# Allegro board bluttooth.brd
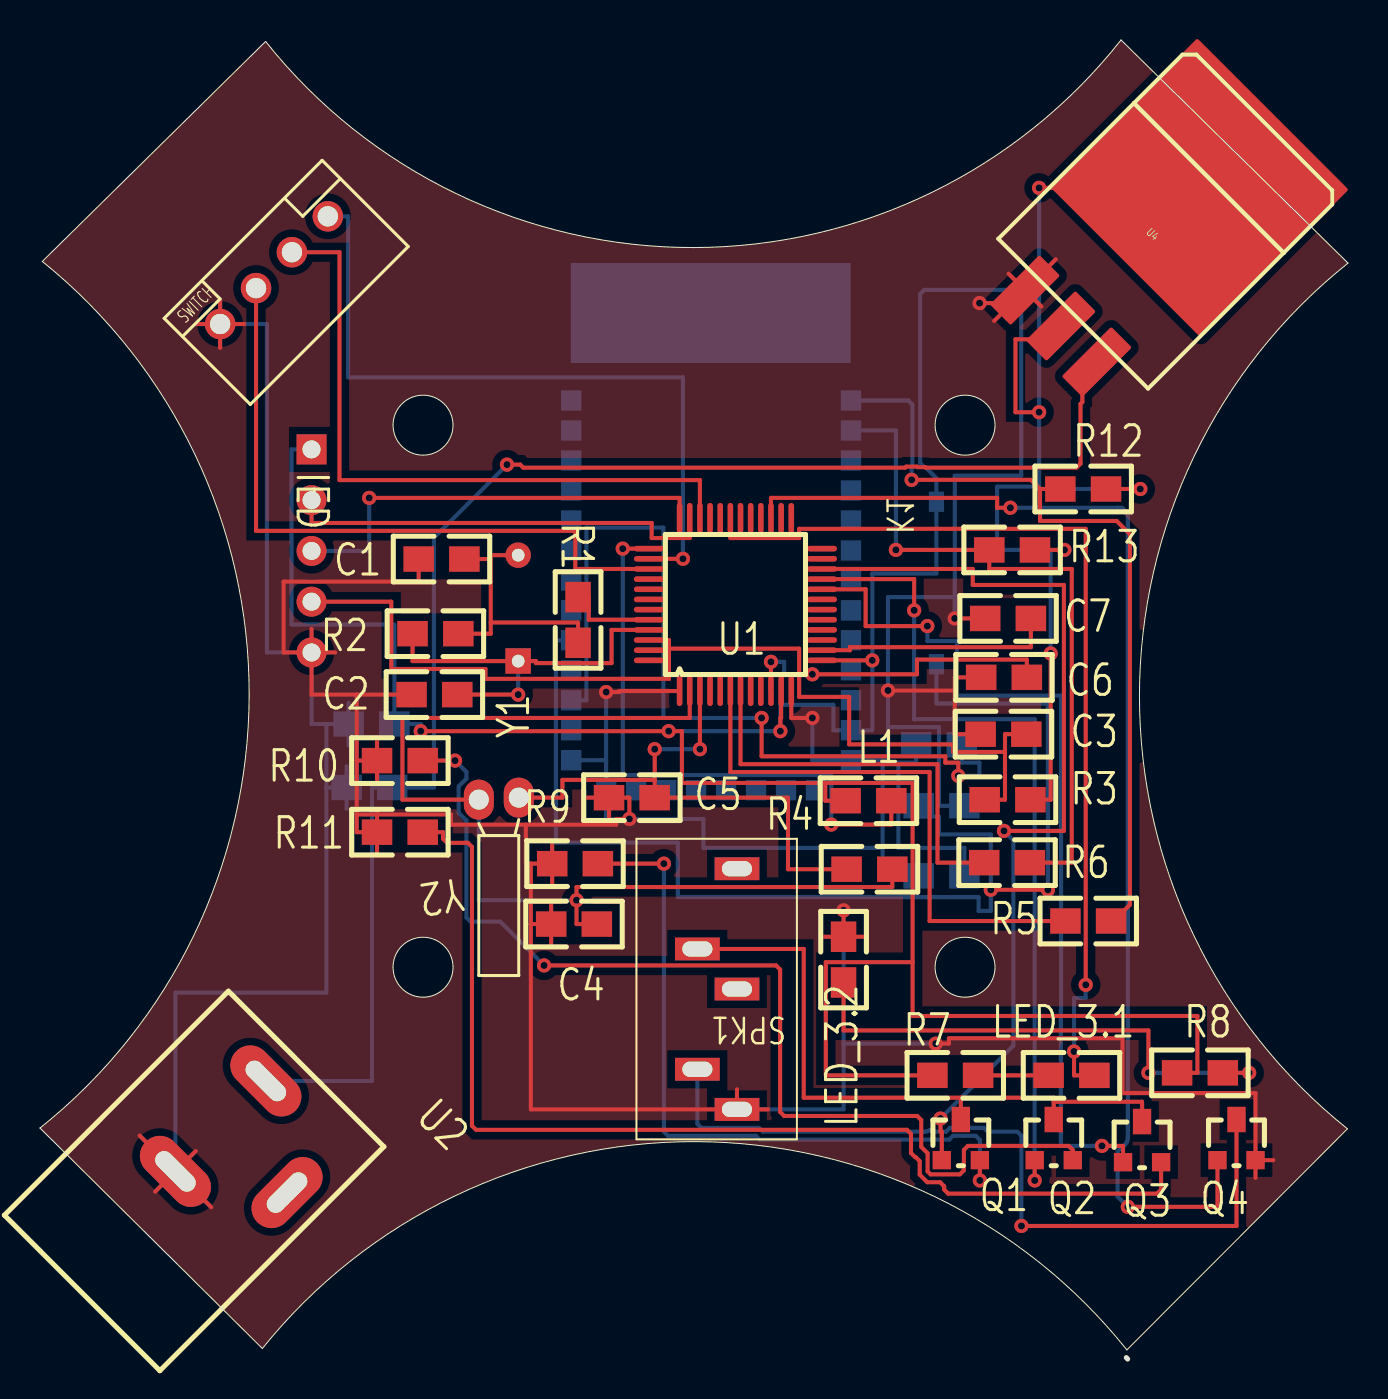
[diagram p0: board, top side]
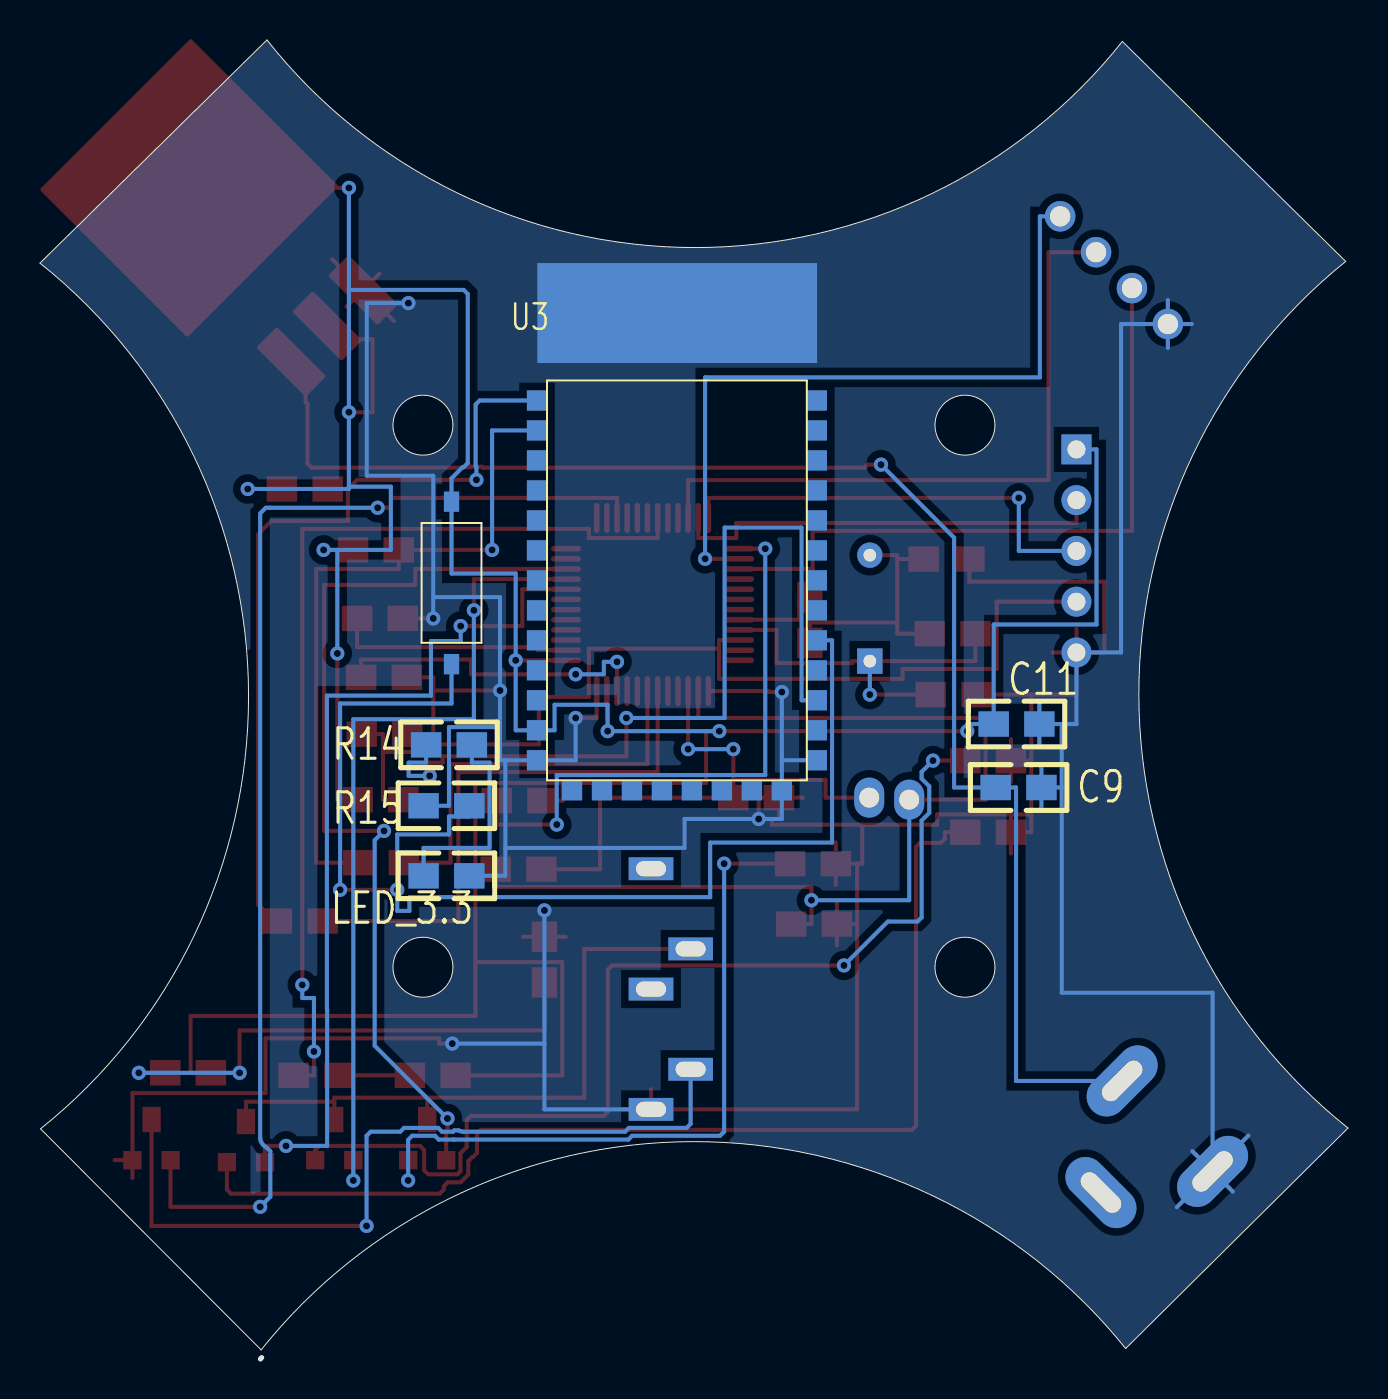
[diagram p1: board, bottom side, seen from below]

Outline 65.45 x 65.99 mm; copper layers: TOP, BOTTOM. Coordinates in mm from the lower left corner of the outline.
Outline path: circle c19.17,46.72 r1.5 ; circle c19.17,19.6 r1.5 ; circle c46.29,46.72 r1.5 ; circle c46.29,19.6 r1.5 ; 54.36,0.07 54.42,0 ; 0.12,54.92 arc(10.47,33.21) 0,11.56 11.13,0.53 arc(32.77,10.88) 54.38,0.46 65.42,11.52 arc(55.01,33.18) 65.45,54.83 54.09,65.99 arc(32.71,55.61) 11.29,65.92 0.12,54.92

## Placement (name value [footprint] x y rotation side)
C1  20P  [0805]  20.09 40.02 0 top
C2  20P  [0805]  19.74 33.24 0 top
C3  10u  [0805]  48.21 31.26 0 top
C4  20P  [0805]  26.72 21.76 0 top
C5  20P  [0805]  29.62 28.09 0 top
C6  10u  [0805]  48.23 34.11 0 top
C7  0.1u  [0805]  48.44 37.05 0 top
C9  10u  [0805]  16.48 28.59 180 bottom
C11  22U  [0805]  16.59 31.77 180 bottom
IED  <Value>  [HDR1X5]  13.59 45.51 270 top
K1  SW PUSHBUTTON  [KEY_0007]  44.86 38.83 90 bottom
L1  IND_MOLDED  [0805]  41.45 27.93 0 top
LED_3.1  RED  [0805]  51.61 14.19 0 top
LED_3.2  RED  [0805]  40.21 19.98 90 top
LED_3.3  RED  [0805]  45.11 24.17 180 bottom
Q1  2N7002LT1  [SOT23_B]  46.08 10.94 0 top
Q2  2N7002LT1  [SOT23_B]  50.72 10.94 0 top
Q3  2N7002LT1  [SOT23_B]  55.14 10.84 0 top
Q4  2N7002LT1  [SOT23_B]  59.87 10.94 0 top
R1  33  [0805]  26.92 36.98 270 top
R2  1M  [0805]  19.79 36.29 0 top
R3  10k  [0805]  48.41 27.98 0 top
R4  10M  [0805]  41.5 24.5 0 top
R5  22  [0805]  52.45 21.91 0 top
R6  22  [0805]  48.39 24.84 0 top
R7  330  [0805]  45.8 14.19 0 top
R8  330  [0805]  58.04 14.32 0 top
R9  4.7k  [0805]  26.77 24.78 0 top
R10  10k  [0805]  18.01 29.94 0 top
R11  15k  [0805]  18.01 26.36 0 top
R12  10k  [0805]  52.2 43.53 0 top
R13  10k  [0805]  48.64 40.48 0 top
R14  330  [0805]  44.98 30.73 180 bottom
R15  10k  [0805]  45.11 27.68 180 bottom
SPK1  PHONEJACK STEREO SW  [AUDIO_3]  33.86 18.51 180 top
SWITCH  CON4  [CON4-B]  11.71 54.48 45 top
U1  NUC122LQFP48PIN  [NUC122LQFP48]  32 33.42 0 top
U2  DC205A  [DC205]  11.3 13.91 315 top
U3  HC_06  [HC-6-BLUETOOTH]  33.58 38.96 180 bottom
U4  AMS1086CM-3.3  [TO262]  55.68 56.28 315 top
Y1  12M  [XALTDIP2]  23.93 34.92 90 top
Y2  32K  [XTAL-3_4MM-2P]  24.26 28.19 180 top

## Library data of the parts
C1-C7 C9 C11 = CAP NP
IED = CON5
K1 = SW PUSHBUTTON_0
L1 R1-R6 R9-R13 R15 = R
LED_3.1-LED_3.3 = LED
Q1-Q4 = NPN_3
R7 R8 R14 = RES1
SPK1 = PHONEJACK STEREO SW
SWITCH = CON4
U1 = NUC122LQFP48PIN
U2 = DC205A
U3 = HC_06
U4 = AMS1117
Y1 Y2 = CRYSTAL

## Footprints (pads in the part's own frame, mm; a bottom-side part is the same pattern mirrored in y, then rotated)
0805
  rect 1.524x1.27 smd: 1(-1.143,0) 2(1.143,0)
AUDIO_3
  rect 2.235x1.143 hole 1.505x0.762: 1(-1.016,6.02) 2(-1.016,0) 3(-1.016,-6.02) 4(0.965,4.013) 5(0.965,-2.007)
CON4-B
  round 1.524 hole 1.016: 1(-3.81,0) 2(-1.27,0) 3(1.27,0) 4(3.81,0)
DC205
  oval 4.2x2 hole 2.5x0.889: 1(0,0) 2(0,-6.4)
  oval 2x4.2 hole 0.889x2.5: 3(4.7,-3.2)
HC-6-BLUETOOTH
  rect 1.016x1.016 smd: 1(-7,9) 2(-7,7.5) 3(-7,6) 4(-7,4.5) 5(-7,3) 6(-7,1.5) 7(-7,0) 8(-7,-1.5) 9(-7,-3) 10(-7,-4.5) 11(-7,-6) 12(-7,-7.5) 13(-7,-9) 14(-5.25,-10.5) 15(-3.75,-10.5) 16(-2.25,-10.5) 17(-0.75,-10.5) 18(0.75,-10.5) 19(2.25,-10.5) 20(3.75,-10.5) 21(5.25,-10.5) 22(7,-9) 23(7,-7.5) 24(7,-6) 25(7,-4.5) 26(7,-3) 27(7,-1.5) 28(7,0) 29(7,1.5) 30(7,3) 31(7,4.5) 32(7,6) 33(7,7.5) 34(7,9)
HDR1X5
  rect 1.5x1.5 hole 0.9: 1(0,0)
  round 1.5 hole 0.9: 2(2.54,0) 3(5.08,0) 4(7.62,0) 5(10.16,0)
KEY_0007
  rect 1.016x0.762 smd: 1(-4.064,0) 2(4.064,0)
NUC122LQFP48
  oval 0.279x1.5 smd: 1(0,0) 2(0.508,0) 3(1.016,0) 4(1.524,0) 5(2.032,0) 6(2.54,0) 7(3.048,0) 8(3.556,0) 9(4.064,0) 10(4.572,0) 11(5.08,0) 12(5.588,0) 25(5.588,8.66) 26(5.08,8.66) 27(4.572,8.66) 28(4.064,8.66) 29(3.556,8.66) 30(3.048,8.66) 31(2.54,8.66) 32(2.032,8.66) 33(1.524,8.66) 34(1.016,8.66) 35(0.508,8.66) 36(0,8.66)
  oval 1.5x0.279 smd: 13(7.124,1.536) 14(7.124,2.044) 15(7.124,2.552) 16(7.124,3.06) 17(7.124,3.568) 18(7.124,4.076) 19(7.124,4.584) 20(7.124,5.092) 21(7.124,5.6) 22(7.124,6.108) 23(7.124,6.616) 24(7.124,7.124) 37(-1.536,7.124) 38(-1.536,6.616) 39(-1.536,6.108) 40(-1.536,5.6) 41(-1.536,5.092) 42(-1.536,4.584) 43(-1.536,4.076) 44(-1.536,3.568) 45(-1.536,3.06) 46(-1.536,2.552) 47(-1.536,2.044) 48(-1.536,1.536)
SOT23_B
  rect 0.914x1.27 smd: D(0,1.041)
  rect 0.914x0.914 smd: G(-0.953,-0.991) S(0.953,-0.991)
TO262
  custom 1.46x3.5 smd: 1(-2.54,-6.5) 2(0,-6.5) 3(2.54,-6.5)
  custom 10.7x10.46 smd: 4(0,3.27)
XALTDIP2
  rect 1.27x1.27 hole 0.635: 1(0,0)
  round 1.27 hole 0.635: 2(5.3,0)
XTAL-3_4MM-2P
  oval 1.5x2 hole 1: 1(0.3,0.1) 2(2.3,0.2)

## Nets
GND: C1.1 C2.1 C3.1 C4.1 C5.1 C6.1 C7.1 C9.2 C11.2 IED.5 LED_3.2.2 LED_3.3.2 Q4.S R9.1 R10.1 R11.1 R15.1 SPK1.1(A) SWITCH.1 U1.1(PVSS) U1.12(VSS) U2.2(GND) U3.13(GND) U3.21(GND2) U3.22(GND1) U4.1(GND)
VCC: C11.1 IED.1 K1.2 L1.1 R3.2 R7.1 R8.1 R12.2 R13.2 U1.11(VDD) U1.13(VBUS) U3.12(3.3) U4.2(VOUT) U4.4(TAB)
VCC5: C9.1 U2.1(VCC) U4.3(VIN)
A_AUDIO: Q4.D SPK1.4(D)
A_INPUT: Q4.G U1.27(PC.11/MOSI10)
B_AUDIO: Q1.D Q2.D Q3.D SPK1.5(E)
B_INPUT: SWITCH.3 U1.34(PA.12/PWM0)
B_NET1: Q1.G U1.22(PC.0/SPISS00)
B_NET2: Q2.G U1.21(PC.1/SPICLK0)
B_NET3: Q3.G U1.20(PC.2/MISO00)
C_INPUT: SWITCH.2 U1.39(PD.1)
ICECLK: IED.3 U1.36(ICE_CK)
ICEDATA: IED.2 U1.35(ICE_DAT)
ICEREST: C3.2 IED.4 R3.1 U1.46(/RESET)
M485D0: SWITCH.4 U1.38(PD.0)
PC8: LED_3.1.2 U1.31(PA.15/PWM3)
RX1: R5.2 R12.1 U3.1(UART_TXD)
TX1: R6.2 R13.1 U3.2(UART_RXD)
N5216881: C1.2 R1.2 R2.2 Y1.2
N5216988: C2.2 R2.1 U1.45(XT_IN) Y1.1
N5217255: R1.1 U1.44(XT_OUT)
N5217819: L1.2 U1.37(AVDD)
N5218038: C4.2 R4.2 U1.2(X320) Y2.2
N5218046: C5.2 R4.1 U1.3(X321) Y2.1
N5218372: R5.1 U1.6(RXD1/PB.4)
N5218376: R6.1 U1.7(TXD1/PB.5)
N5218431: C6.2 U1.10(LDO)
N5218586: C7.2 U1.14(VDD33)
N5220113: Q1.S R9.2
N5220117: Q2.S R10.2
N5220121: Q3.S R11.2
N5266307: R14.1 U3.24(PIO1)
N5267341: K1.1 R15.2 U3.26(PIO3)
N52166540: LED_3.2.1 R8.2
N52189870: LED_3.1.1 R7.2
N52662210: LED_3.3.1 R14.2

Pads without a net: SPK1 2 3; U1 4 5 8 9 15 16 17 18 19 23 24 25 26 28 29 30 32 33 40 41 42 43 47 48; U2 3; U3 3 4 5 6 7 8 9 10 11 14 15 16 17 18 19 20 23 25 27 28 29 30 31 32 33 34

## Via types
v1: diameter 0.711, hole 0.356, TOP to BOTTOM, 51 vias

## Routing (per net, layer and track width the routed paths; a pad name or vN(x,y) marks a point on that pad's centre or on a via; arc(x,y) is an arc through that point)
GND: length 324.7
  TOP w0.203: 40.21,21.13 v1(40.21,22.45) ; 40.21,21.13 41.27,21.13 ; 40.21,21.13 39.14,21.13 ; U4.1 50.11,52.66 ; U4.1 48.46,54.3 ; U4.1 47.74,51.94 ; U4.1 49.28,52.83 v1(47.01,52.83) ; U4.1 50.83,55.02 ; R9.1 25.63,25.85 ; R9.1 24.56,24.78 ; R9.1 25.63,23.72 ; 4.99,11.18 U2.2 ; U2.2 8.57,7.6 ; U2.2 5.76,8.37 ; U2.2 7.79,10.4 ; SPK1.1 34.87,13.49 ; SPK1.1 24.56,12.49 24.56,21.76 ; SPK1.1 36.42,12.49 ; 45.77,33.45 45.77,31.26 C3.1 ; 45.77,33.45 v1(42.43,33.45) ; 45.77,33.45 45.77,34.11 C6.1 ; IED.5 13.59,36.53 ; IED.5 13.59,33.24 15.85,33.24 ; IED.5 12.19,35.35 12.19,38.89 18.95,38.89 C1.1 ; IED.5 14.77,35.35 ; 15.85,33.24 C2.1 ; 15.85,33.24 15.85,29.94 ; 24.56,24.78 24.56,21.76 ; 24.56,24.78 24.31,24.78 24.31,26.73 ; 24.56,21.76 C4.1 ; v1(45.77,37.05) C7.1 ; v1(28.33,33.37) 28.99,33.37 28.99,33.42 U1.1 ; 15.85,27.25 15.85,26.36 R11.1 ; 15.85,27.25 20.56,27.25 20.56,26.73 24.31,26.73 ; 15.85,27.25 15.85,29.94 ; 15.85,29.94 R10.1 ; Q4.S 61.71,9.95 ; Q4.S 60.82,9.06 ; Q4.S 60.82,13.3 54.16,13.3 54.16,16.05 45.48,16.05 45.48,15.78 v1(44.82,15.78) ; C4.1 25.58,22.83 ; C4.1 25.58,20.69 ; 16.87,28.87 R10.1 ; R10.1 16.87,31.01 ; U1.12 37.59,32.07 v1(38.65,32.07) ; 24.31,26.73 28.83,26.73 28.83,27.02 v1(29.49,27.02) 29.49,28.09 C5.1 ; 7.82,51.78 SWITCH.1 ; SWITCH.1 9.01,52.98 ; SWITCH.1 9.01,50.59 ; SWITCH.1 10.21,51.78 ; 27.28,28.09 C5.1 ; C5.1 28.47,27.02 ; R11.1 16.87,27.43 ; R11.1 16.87,25.29
  BOTTOM w0.203: U2.2 7.79,10.4 ; U2.2 4.99,11.18 ; U2.2 6.78,18.33 14.33,18.33 14.33,28.59 ; U2.2 8.57,7.6 ; U2.2 5.76,8.37 ; 45.77,38.12 v1(45.77,37.05) ; 45.77,38.12 42.43,38.12 v1(42.43,33.45) 42.43,31.62 ; 45.77,38.12 45.77,44.19 49.1,44.19 49.1,52.83 v1(47.01,52.83) ; 14.33,28.59 C9.2 ; 14.33,28.59 14.33,31.77 ; 42.43,31.62 44.98,31.62 44.98,27.68 R15.1 ; 42.43,31.62 42.43,29.96 42.16,29.96 ; 40.21,15.78 v1(44.82,15.78) ; 40.21,15.78 v1(40.21,22.45) ; 40.21,15.78 40.21,12.49 SPK1.1 ; LED_3.3.2 42.16,24.17 42.16,25.57 ; C9.2 15.34,29.66 ; C9.2 15.34,27.53 ; C11.2 15.44,32.84 ; C11.2 15.44,30.7 ; C11.2 14.33,31.77 ; 28.33,29.96 U3.21 28.33,27.02 v1(29.49,27.02) 33.2,27.02 33.2,25.57 42.16,25.57 ; 28.33,29.96 U3.22 ; 28.33,29.96 v1(28.33,33.37) ; 42.16,25.57 42.16,29.96 ; SWITCH.1 9.01,52.98 ; SWITCH.1 7.82,51.78 ; SWITCH.1 11.36,51.78 11.36,35.35 IED.5 13.59,31.77 14.33,31.77 ; SWITCH.1 9.01,50.59 ; 42.16,29.96 U3.13 38.65,29.96 v1(38.65,32.07)
VCC: length 205.8
  TOP w0.203: v1(37.05,31.41) 37.05,32.07 37.08,32.07 U1.11 ; R8.1 57.91,14.32 57.91,17.16 43.66,17.16 43.66,19.86 ; 43.66,19.86 43.66,28.82 39.29,28.82 ; 43.66,19.86 39.32,19.86 39.32,14.19 R7.1 ; 39.29,28.82 32.12,28.82 32.12,31.41 v1(31.46,31.41) v1(19.05,31.41) ; 39.29,28.82 39.29,27.93 L1.1 ; v1(49.99,47.37) 48.81,47.37 48.81,51.02 51.08,51.02 U4.2 ; U4.4 57.99,58.59 v1(49.99,58.59) ; v1(50.57,35.3) 50.57,27.98 R3.2 ; U1.13 v1(41.65,34.96) ; R13.2 v1(51.26,40.48) ; R12.2 v1(55.05,43.53)
  BOTTOM w0.203: 49.99,43.64 v1(49.99,47.37) 49.99,53.49 ; 49.99,43.64 47.89,43.64 47.89,40.48 50.57,40.48 ; 49.99,43.64 49.99,43.53 v1(55.05,43.53) ; v1(51.26,40.48) 50.57,40.48 ; 50.57,40.48 v1(50.57,35.3) ; 49.99,53.49 v1(49.99,58.59) ; 49.99,53.49 44.25,53.49 44.04,53.29 44.04,44.82 44.25,44.62 44.3,44.62 44.86,44.06 K1.2 44.86,39.3 41.65,39.3 v1(41.65,34.96) 41.65,31.46 U3.12 39.7,31.46 39.7,32.73 37.05,32.73 v1(37.05,31.41) v1(31.46,31.41) ; v1(19.05,31.41) 19.05,31.77 C11.1 17.73,36.75 12.58,36.75 12.58,45.51 IED.1
VCC5: length 75.1
  TOP w0.203: v1(23.37,44.75) 24.03,44.75 24.18,44.6 43.29,44.6 43.34,44.65 43.89,44.65 43.91,44.62 44.3,44.62 44.32,44.6 51.86,44.6 52.06,44.8 52.06,47.79 52.15,47.88 52.15,49.17 U4.3 52.88,49.89
  BOTTOM w0.203: U2.1 16.61,13.91 16.61,28.59 C9.1 19.71,28.59 19.71,41.09 v1(23.37,44.75)
A_AUDIO: length 40
  TOP w0.203: v1(49.11,6.66) 59.87,6.66 Q4.D
  BOTTOM w0.203: SPK1.4 32.89,11.77 33.1,11.56 35.98,11.56 36.17,11.37 44.28,11.37 44.39,11.39 44.5,11.44 44.72,11.44 44.79,11.37 45.33,11.37 45.52,11.56 47.23,11.56 47.42,11.37 48.9,11.37 49.11,11.17 v1(49.11,6.66)
A_INPUT: length 61.4
  TOP w0.203: v1(54.43,7.61) 58.91,7.61 Q4.G ; v1(48.55,42.59) 47.89,42.59 47.89,43.08 36.58,43.08 U1.27
  BOTTOM w0.203: v1(54.43,7.61) 53.92,8.12 53.92,10.4 54.11,10.58 54.21,10.64 54.29,10.72 54.36,10.82 54.4,10.92 54.43,11.03 54.43,11.1 54.43,42.31 54.15,42.59 53.92,42.59 v1(48.55,42.59)
B_AUDIO: length 32.9
  TOP w0.203: Q3.D 55.14,12.87 50.72,12.87 ; 50.72,12.87 50.72,13.07 46.08,13.07 ; 50.72,12.87 Q2.D ; 46.08,13.07 38.21,13.07 38.21,20.52 SPK1.5 ; 46.08,13.07 Q1.D
B_INPUT: length 33.7
  TOP w0.203: U1.34 33.02,43.97 14.99,43.97 14.99,55.38 SWITCH.3
B_NET1: length 46.4
  TOP w0.203: v1(45.06,12.03) 45.06,11.37 45.12,11.37 Q1.G ; v1(48.23,26.42) 51.23,26.42 51.23,38.73 46.67,38.73 46.67,39.53 U1.22
  BOTTOM w0.203: v1(48.23,26.42) 48.7,25.96 48.7,15.67 v1(45.06,12.03)
B_NET2: length 41.7
  TOP w0.203: U1.21 43.74,39.02 v1(43.74,37.46) ; Q2.G v1(49.77,8.93)
  BOTTOM w0.203: v1(43.74,37.46) 43.74,32.01 49.77,32.01 v1(49.77,8.93)
B_NET3: length 43.8
  TOP w0.203: U1.20 41.31,38.51 41.31,36.67 v1(44.4,36.67) ; Q3.G 54.19,10.66 v1(53.14,10.66)
  BOTTOM w0.203: v1(53.14,10.66) 51.08,10.66 51.08,17.49 51.09,17.49 51.09,33.19 45.88,33.19 45.88,35.92 44.4,35.92 v1(44.4,36.67)
C_INPUT: length 33.7
  TOP w0.203: SWITCH.2 10.81,41.43 26.78,41.43 26.78,39.53 U1.39
ICECLK: length 22.1
  TOP w0.203: v1(16.47,43.08) 32,43.08 U1.36
  BOTTOM w0.203: IED.3 16.47,40.43 v1(16.47,43.08)
ICEDATA: length 21.8
  TOP w0.203: U1.35 32.51,41.08 30.61,41.08 30.61,41.83 13.59,41.83 IED.2
ICEREST: length 52
  TOP w0.203: 31.47,35.54 31.47,34.03 22.29,34.03 22.29,34.53 17.58,34.53 17.58,37.89 IED.4 ; 31.47,35.54 37.99,35.54 37.99,33.13 40.49,33.13 40.49,30.75 45.69,30.75 45.69,30.37 48.28,30.37 ; 31.47,35.54 31.47,35.97 U1.46 ; 48.28,30.37 48.28,27.98 R3.1 ; 48.28,30.37 48.28,31.26 C3.2
M485D0: length 36.6
  TOP w0.203: U1.38 v1(32.17,40.04)
  BOTTOM w0.203: SWITCH.4 15.42,57.17 15.42,49.11 32.17,49.11 v1(32.17,40.04)
PC8: length 48.2
  TOP w0.203: U1.31 34.54,41.08 37.99,41.08 37.99,41.54 52.32,41.54 v1(52.32,18.72) ; LED_3.1.2 51.74,14.19 v1(51.74,15.39)
  BOTTOM w0.203: v1(51.74,15.39) 51.74,18.06 52.32,18.06 v1(52.32,18.72)
RX1: length 40.8
  TOP w0.203: R12.1 50.04,43.53 ; 50.04,43.53 50.04,41.93 53.87,41.93 54.54,41.27 54.54,22.73 53.72,21.91 R5.2 ; 50.04,43.53 49.58,43.99 v1(43.61,43.99)
  BOTTOM w0.203: v1(43.61,43.99) 43.61,44.65 43.65,44.69 43.65,47.75 43.45,47.96 U3.1
TX1: length 34.8
  TOP w0.203: R6.2 51.62,24.84 51.62,39.53 47.5,39.53 R13.1 v1(42.83,40.48)
  BOTTOM w0.203: v1(42.83,40.48) 42.83,46.46 U3.2
N5216881: length 13.6
  TOP w0.203: 22.55,40.02 22.55,40.22 Y1.2 ; 22.55,40.02 C1.2 ; 22.55,40.02 22.55,36.85 ; 22.55,36.85 26.92,36.85 R1.2 ; 22.55,36.85 22.55,36.29 R2.2
N5216988: length 19.7
  TOP w0.203: C2.2 v1(23.93,33.24) ; U1.45 28.6,36.48 28.6,34.82 24.82,34.82 24.82,34.92 Y1.1 18.64,34.92 R2.1
  BOTTOM w0.203: v1(23.93,33.24) Y1.1
N5217255: length 4.7
  TOP w0.203: U1.44 27.46,36.99 27.46,38.12 R1.1
N5217819: length 29.7
  TOP w0.203: L1.2 42.6,26.74 v1(39.59,26.74) ; U1.37 v1(29.16,40.54)
  BOTTOM w0.203: v1(29.16,40.54) 29.16,29.22 39.59,29.22 v1(39.59,26.74)
N5218038: length 53.1
  TOP w0.203: C4.2 26.85,21.76 v1(26.85,22.96) 26.85,23.62 42.65,23.62 R4.2 ; Y2.2 18.14,27.99 18.14,32.07 32.51,32.07 U1.2
  BOTTOM w0.203: Y2.2 21.96,22.96 v1(26.85,22.96)
N5218046: length 28.5
  TOP w0.203: U1.3 v1(33.02,30.51) ; 30.76,28.98 C5.2 37.43,28.09 37.43,24.5 R4.1 ; 30.76,28.98 26.14,28.98 26.14,28.09 Y2.1 ; 30.76,28.98 v1(30.76,30.51)
  BOTTOM w0.203: v1(30.76,30.51) v1(33.02,30.51)
N5218372: length 28.3
  TOP w0.203: R5.1 44.51,21.91 44.51,29.37 34.54,29.37 U1.6
N5218376: length 20.8
  TOP w0.203: U1.7 35.05,29.76 44.91,29.76 44.91,24.84 R6.1
N5218431: length 16.5
  TOP w0.203: U1.10 v1(36.58,34.88) ; v1(38.65,34.26) 43.88,34.26 43.88,35 49.38,35 C6.2
  BOTTOM w0.203: v1(38.65,34.26) 37.24,34.26 37.24,34.88 v1(36.58,34.88)
N5218586: length 12
  TOP w0.203: C7.2 49.58,35.62 40.53,35.62 40.53,35.46 U1.14
N5220113: length 35.9
  TOP w0.203: R9.2 v1(31.22,24.78) ; Q1.S v1(47.03,8.93)
  BOTTOM w0.203: v1(47.03,8.93) 47.03,10.97 46.82,11.17 45.69,11.17 45.5,10.98 44.74,10.98 44.74,10.98 36.01,10.98 35.82,11.17 31.42,11.17 31.22,11.37 v1(31.22,24.78)
N5220117: length 53
  TOP w0.203: Q2.S 51.68,10.46 51.47,10.66 46.43,10.66 46.23,10.46 46.23,9.44 46.02,9.24 44.56,9.24 44.41,9.39 44.41,10.29 44.09,10.61 44.09,11.96 43.89,12.16 37.24,12.16 37.03,12.36 37.03,19.49 36.83,19.69 v1(25.22,19.69) ; R10.2 v1(20.77,29.94)
  BOTTOM w0.203: v1(25.22,19.69) 23.02,21.89 21.54,21.89 21.34,22.09 21.34,26.94 20.95,27.32 20.95,28.65 21.34,29.04 21.34,29.37 v1(20.77,29.94)
N5220121: length 55.3
  TOP w0.203: R11.2 20.17,26.36 20.17,26.03 20.37,25.83 21.41,25.83 21.61,25.62 21.61,11.67 21.82,11.47 43.38,11.47 43.58,11.26 43.58,10.31 43.79,10.1 43.81,10.1 44.02,9.9 44.02,9.22 44.4,8.85 45.04,8.85 45.24,8.64 45.24,8.48 45.44,8.27 55.89,8.27 56.1,8.48 Q3.S
N5266307: length 43.9
  TOP w0.203: v1(36.11,32.07) 36.11,30.16 45.3,30.16 45.3,29.84 45.95,29.84 v1(45.95,29.18)
  BOTTOM w0.203: U3.24 27.34,32.96 27.34,41.6 31.19,41.6 31.19,32.07 v1(36.11,32.07) ; v1(45.95,29.18) 47,29.18 47,29.84 46.13,29.84 R14.1
N5267341: length 64.6
  TOP w0.203: v1(50.43,23.48) v1(47.57,23.48)
  BOTTOM w0.203: K1.1 44.86,32.8 50.43,32.8 v1(50.43,23.48) ; R15.2 43.97,27.15 44.98,27.15 44.98,26.24 47.57,26.24 v1(47.57,23.48) 47.57,22.42 46.96,22.42 46.96,23.11 31.91,23.11 31.91,25.84 25.82,25.84 25.82,35.96 U3.26
N52166540: length 26.1
  TOP w0.203: LED_3.2.1 40.21,16.44 55.46,16.44 v1(55.46,14.32) ; R8.2 v1(60.5,14.32)
  BOTTOM w0.203: v1(55.46,14.32) v1(60.5,14.32)
N52189870: length 3.5
  TOP w0.203: LED_3.1.1 R7.2
N52662210: length 10.7
  BOTTOM w0.203: R14.2 43.84,29.84 42.95,29.84 42.95,25.57 46.25,25.57 LED_3.3.1

## Copper pours and planes (outline as drawn; the poured copper is in the pictures)
GND on BOTTOM (solid shape): 40.56,49.83 26.56,49.83 26.56,54.83 40.56,54.83
GND on TOP: 65.45,54.83 55.01,33.18 65.42,11.52 54.38,0.46 32.77,10.88 11.13,0.53 0,11.56 10.47,33.21 0.12,54.92 11.29,65.92 32.71,55.61 54.09,65.99 ; 32 cut-outs
GND on BOTTOM: 0,11.56 10.47,33.21 0.12,54.92 11.29,65.92 32.71,55.61 54.09,65.99 65.45,54.83 55.01,33.18 65.42,11.52 54.38,0.46 32.77,10.88 11.13,0.53 ; 11 cut-outs

## Text on the board
NCLEGEND-1-2: FIGURE | SIZE | 14.0 | 25.0 | 35.43 | 39.37 | 40.0 | 59.25x30.0 | 98.42x35.0 | DRILL CHART: TOP to BOTTOM | ALL UNITS ARE IN MILS | PLATED | QTY | 51 | 2 | 5 | 4 | 1
